# Altium PCB PCB1.PcbDoc
Units mm, origin at the board's own origin, x right, y up, seen from the top; angles counter-clockwise.
Board outline 10.56 x 10.31 mm, 2 copper layers (Top Layer, Bottom Layer), stack 0.2 mm thick; 10 components, 6 nets, 23 pads, 5 vias.
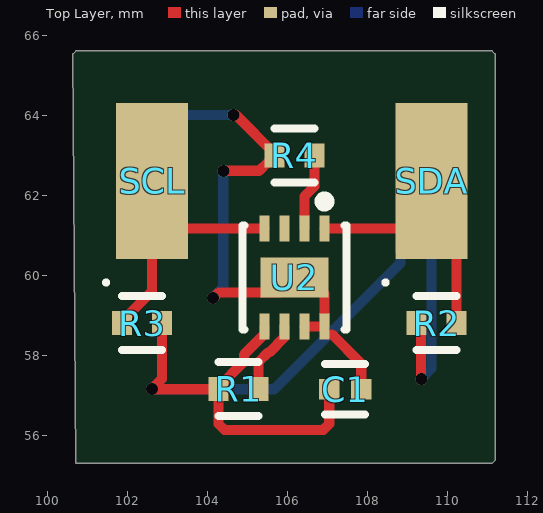
[diagram p0: Top Layer view]
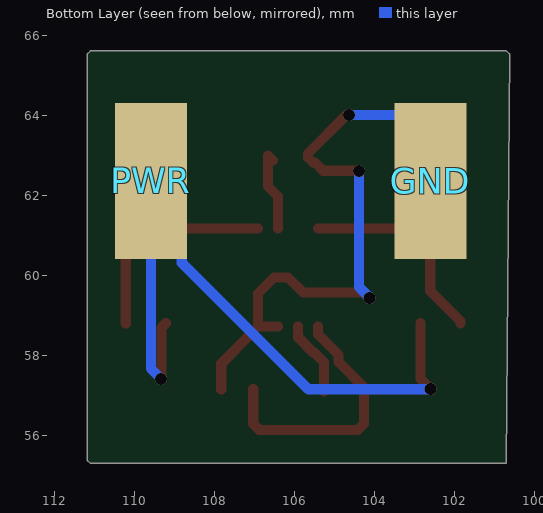
[diagram p1: Bottom Layer view, seen from below]
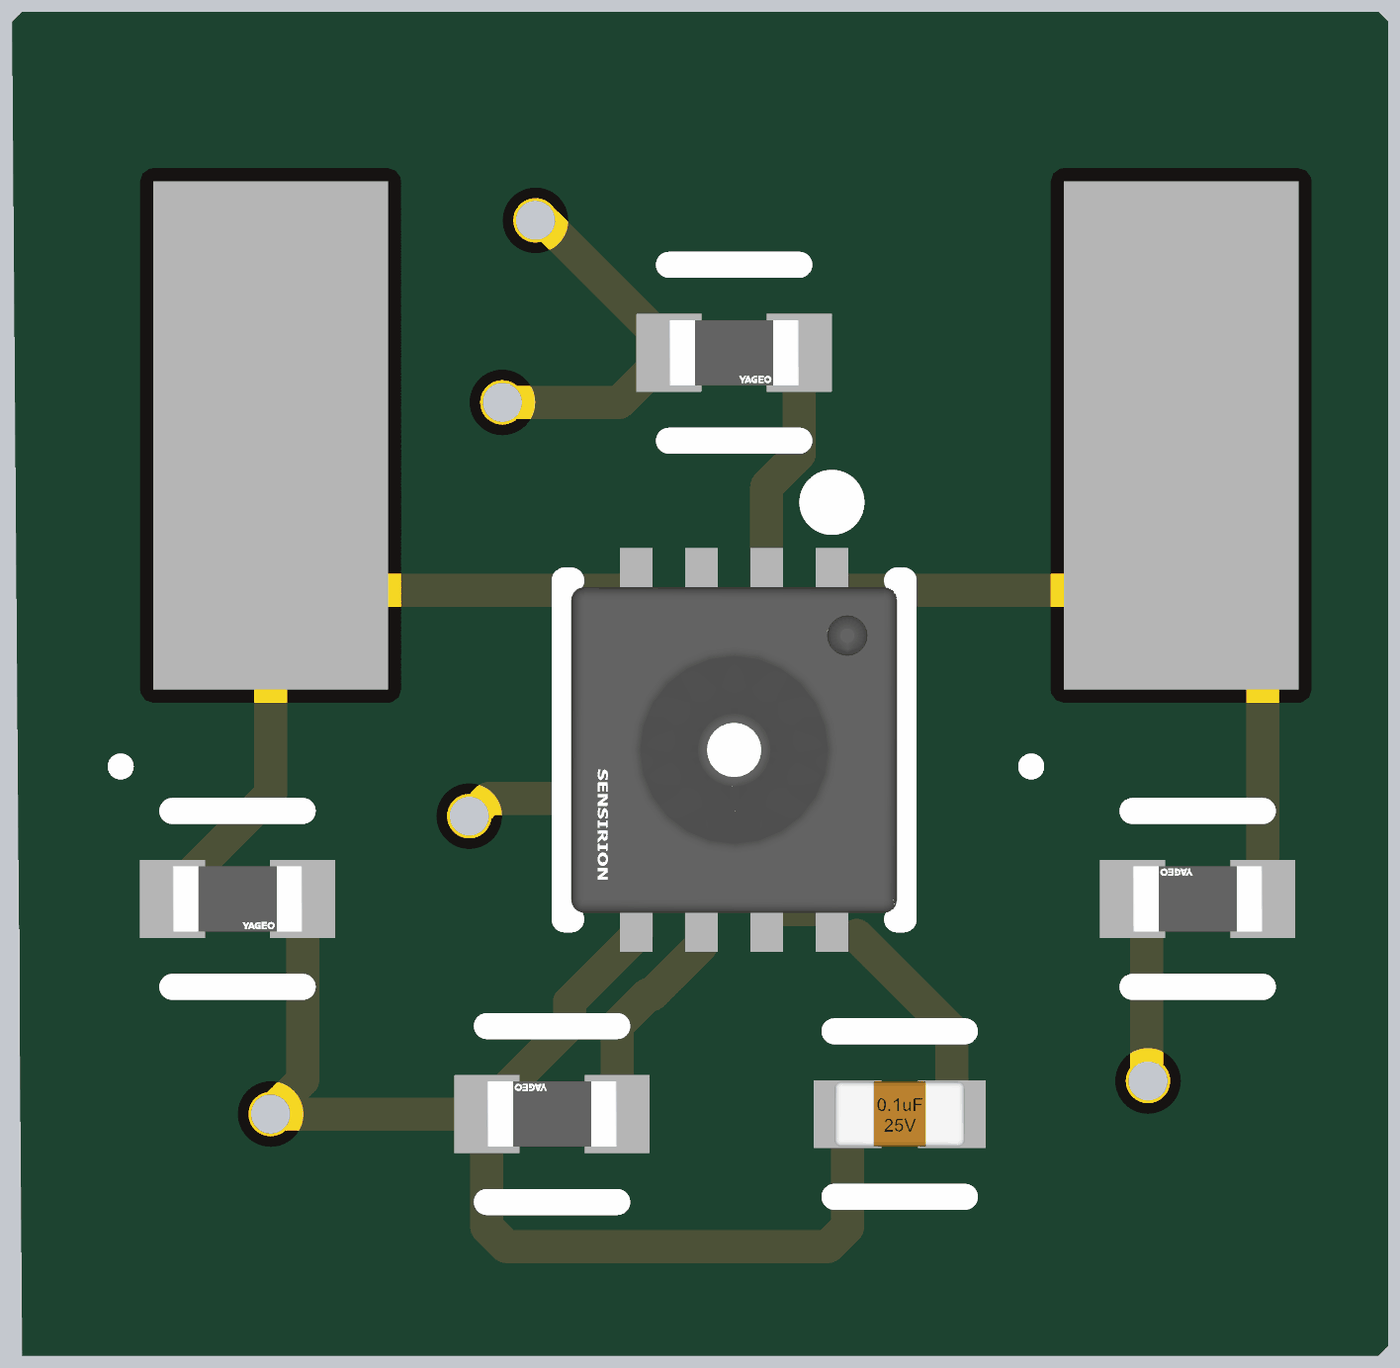
[diagram p2: 3D render of the assembled board from above, using the file's embedded part models]

## Layer stack, top to bottom
Top Solder: solder mask 0.0254, Solder Resist, Dk 4
Top Layer: signal copper 0.035
Dielectric 1: prepreg 0.1295, PP-017, Dk 4.3
Bottom Layer: signal copper 0.035
Bottom Solder: solder mask 0.0254, Solder Resist, Dk 4

## Board outline
100.711,55.295 111.113,55.295 111.19,55.372 111.19,65.532 111.113,65.609 100.711,65.609 100.634,65.532

## Design rules (kind name [scope] priority, off if disabled: settings)
Clearance [All] p1: gap=0.254 ignorepadtopadclearanceinfootprint=FALSE except(0: Arc-Hole Track-Hole SMDPad-Hole THPad-Hole Via-Hole Fill-Hole Poly-Hole Region-Hole Text-Hole; 0.1: Arc-Arc Arc-Track Arc-SMDPad Arc-THPad Arc-Via Arc-Fill Arc-Poly Arc-Region Track-Track Track-SMDPad Track-THPad Track-Via Track-Fill Track-Poly Track-Region)
PolygonConnect [All] p1: connectstyle=Relief reliefconductorwidth=0.254 reliefentries=4 polygonreliefangle="90 Angle" airgapwidth=0.254
RoutingVias [All] p1: holewidth=0.711 width=1.27 viastyle="Through Hole" minholewidth=0.711 minwidth=1.27 maxholewidth=0.711 maxwidth=1.27
SolderMaskExpansion [All] p1: expansion=0.102 istentingtop=FALSE
Width [All] p1: maxlimit=0.254 minlimit=0.254 preferedwidth=0.254
30 further rules are at their usual default settings.

## Components (designator, comment, footprint, x,y, rotation, side; value= is the part's Value field where it differs from the comment)
C1 "100nF" FP-C0402-BB-MFG 107.442,57.15 r0 top value="0.10 μF"
GND "Solder pad" pad#1 102.616,62.357 r90 top
PWR "Solder pad" pad#1 109.601,62.357 r90 top
R1 "10k" FP-AC0402-MFG 104.775,57.15 r180 top
R2 "10k" FP-AC0402-MFG 109.728,58.801 r180 top
R3 "10k" FP-AC0402-MFG 102.362,58.801 r0 top
R4 "10k" FP-AC0402-MFG 106.172,62.992 r0 top
SCL "Solder pad" pad#2 102.616,62.357 r90 top
SDA "Solder pad" pad#2 109.601,62.357 r90 top
U2 "SHT31-DIS-B2.5KS" FP-SHT31-DIS-B2_5KS-MFG 106.172,59.944 r270 top

## Footprints (in the part's own frame and the unit in brackets; to place one, negate y for a bottom-side part, rotate by r counter-clockwise, add the part's x,y. Pads: shape width x height; smd on the part's side, far side on the other; paste and mask are expansions set on the pad)
FP-AC0402-MFG [mm]
  rect 0.5x0.6 smd paste+0 mask+0: 1(-0.5,0) 2(0.5,0)
  silkscreen extent -0.5,-0.67 0.5,0.67, body extent -0.85,-0.4 0.85,0.4, height 0.25
FP-C0402-BB-MFG [mm]
  rect 0.52x0.52 smd paste+0 mask+0: 1(-0.4,0) 2(0.4,0)
  silkscreen extent -0.5,-0.64 0.5,0.64, body extent -0.8,-0.4 0.8,0.4, height 0.25
FP-SHT31-DIS-B2_5KS-MFG [mm]
  rect 0.65x0.25 smd paste-1000 mask+0: 1(-1.225,0.75) 2(-1.225,0.25) 3(-1.225,-0.25) 4(-1.225,-0.75) 5(1.225,-0.75) 6(1.225,-0.25) 7(1.225,0.25) 8(1.225,0.75)
  rect 1x1.7 smd paste-1000 mask+0: 9(0,0)
  silkscreen extent -2.02,-1.3 1.3,1.3, body extent -1.65,-1.4 1.65,1.4, height 0.25
pad#1 [mm] "solder pad"
  rect 3.9x1.8 smd far side: 1(0,0)
  silkscreen extent -2.59,1.1 -2.49,1.2
pad#2 [mm] "solder pad"
  rect 3.9x1.8 smd: 1(0,0)
  silkscreen extent -2.59,1.1 -2.49,1.2

## Part data
C1: library part CMP-2008-02046-2, "CAP CER 0.1UF 10V X5R 0402", Capacitance="0.10 μF", Manufacturer=Kemet, Manufacturer Part Number=C0402C104K8PACTU, Package=C0402-BB, Temperature="-55°C to +125°C", Temperature Characteristic=X5R, Temperature Coefficient=15%, Temperature Range High=+125°C, Temperature Range Low=-55°C, Tolerance=0.1, Voltage Rating="10 V", Automotive=No, Category=Cap, ComponentLink2Description=Datasheet, ComponentLink2URL=https://content.kemet.com/datasheets/KEM_C1002_X7R_SMD.pdf, Device Class L1="Passive Components", Device Class L2=Capacitors, Device Class L3="Ceramic Capacitors", Digikey Description="CAP CER 0.1UF 10V X5R 0402", Height=0.55mm, Ipc Land Pattern Name=CAPC10050X50, Lead Free=Yes, Material=Ceramic, Mouser Description="Capacitor 100 nF 10 VDC 0402", Octopart=https://octopart.com/c0402c104k8pactu-kemet-140039, RoHS=TRUE
GND PWR SCL SDA: library part pad
R1 R2 R3 R4: library part CMP-2002-01790-3, "RES 10kΩ ±1% 0.063W 0402", Case Code (Imperial)=0402, Case Code (Metric)=1005, Max Operating Temperature=155°C, Max Power Dissipation=63mW, Min Operating Temperature=-55°C, Power Rating=62.5mW, Resistance=10kR, Resistor Type="Thick Film", Temperature Coefficient=100ppm/°C, Tolerance=1%, Voltage Rating=50V, Case/Package=0402, Construction=Rectangular, Depth=0.5mm, Features="Moisture Resistant", Height=0.015inch, Lead Free="Lead Free", Length=0.039inch, Military Standard=Not, Number of Terminations=2, Packaging="Tape and Reel", RoHS Compliant=Yes, Series=AC, Size Code=0402, Termination=SMD/SMT, Width=0.02inch
U2: library part CMP-144040-000009-1, "SENSOR HUMID/TEMP 5V I2C 2% SMD", RoHS Compliant=Yes

## Via types
v1: diameter 0.3, hole 0.3, Top Layer to Bottom Layer, 5 vias

## Nets (pads, with @x,y where several pads share a name; then routed paths per layer and width w, separated by ;. In a path a pad name is that pad's centre, name@x,y a point inside that pad or via, vN(x,y) a via of type N, cw(c..) or ccw(c..) an arc to the next point about the centre after c; other vN are vias at no path point)
+3: C1.1 PWR.1 R1.2 R2.2 R3.2 U2.5 | length 26.1
  Top Layer w0.254: R3.2 102.862,57.408 102.616,57.162 v1(102.616,57.15) R1.2 ; U2.5 105.422,58.523 104.909,58.01 104.909,57.834 104.275,57.2 R1.2 ; C1.1 107.042,56.283 106.893,56.134 104.424,56.134 104.275,56.283 R1.2 ; R2.2 109.338,58.691 109.338,57.413 v1(109.347,57.404)
  Bottom Layer w0.254: v1(102.616,57.15) 105.664,57.15 108.828,60.314 108.828,60.534 109.011,60.717 109.601,60.717 109.601,57.67 109.347,57.416 v1(109.347,57.404) ; PWR.1@108.839,61.053 PWR.1@108.839,62.103 ; PWR.1@109.601,60.833 109.601,61.307 PWR.1
GND: C1.2 GND.1 R4.1 U2.7 U2.8 U2.9 | length 15.6
  Top Layer w0.254: v1(104.14,59.436) 104.152,59.436 104.287,59.571 105.799,59.571 U2.9 106.522,59.944 106.922,59.544 U2.8 ; v1(104.394,62.611) 105.291,62.611 105.499,62.819 105.549,62.819 105.672,62.942 R4.1 105.672,63.042 104.715,63.999 104.657,63.999 v1(104.648,64.008) ; U2.7 U2.8@106.92,58.719 ; 107.112,58.521 107.842,57.791 C1.2
  Bottom Layer w0.254: GND.1 102.616,63.235 103.389,64.008 v1(104.648,64.008) ; v1(104.14,59.436) 104.14,59.448 104.394,59.702 v1(104.394,62.611)
NetR1_1: R1.1 U2.6 | length 1.9
  Top Layer w0.254: R1.1@105.275,57.1 R1.1 105.275,57.831 105.509,58.065 105.54,58.065 105.92,58.446 105.92,58.717 U2.6
NetR4_2: R4.2 U2.2 | length 2.1
  Top Layer w0.254: U2.2 106.422,61.967 106.672,62.217 R4.2 R4.2@106.549,62.869
SCL_PAD: R3.1 SCL.1 U2.4 | length 7.2
  Top Layer w0.254: R3.1 101.862,58.851 102.616,59.605 SCL.1@102.616,61.942 ; SCL.1@102.497,62.238 SCL.1 SCL.1@102.616,61.942 ; U2.4 103.389,61.169 SCL.1@102.616,61.942
SDA_PAD: R2.1 SDA.1 U2.1 | length 7.2
  Top Layer w0.254: U2.1 108.828,61.169 109.601,61.942 SDA.1 110.228,61.73 R2.1
pads on no net: U2.3

## Other copper
Bottom Layer:

## Silkscreen, mask and mechanical layers (free items; w line width, h text height)
Mechanical 1:
  lines w0.154: 100.711,55.372 111.113,55.372 111.113,65.532 100.711,65.532 100.711,55.372